# Altium PCB PCB1.PcbDoc
Units mm, origin at the board's own origin, x right, y up, seen from the top; angles counter-clockwise.
Board outline 150 x 32 mm, 2 copper layers (Top Layer, Bottom Layer); 77 components, 111 nets, 365 pads, 146 vias.
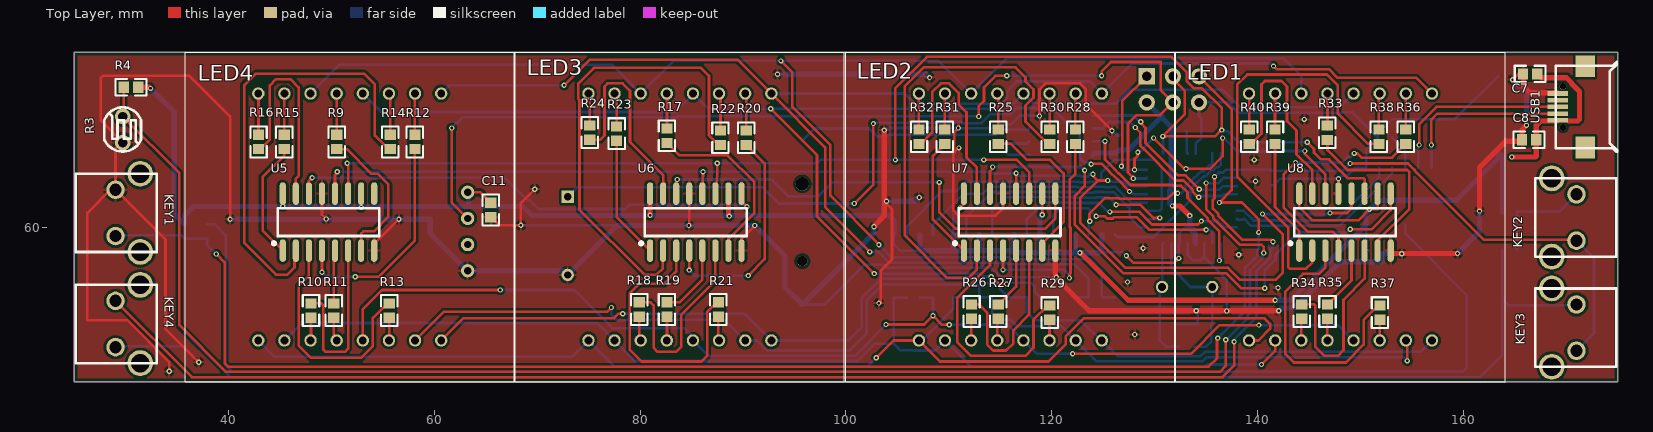
[diagram p0: Top Layer view]
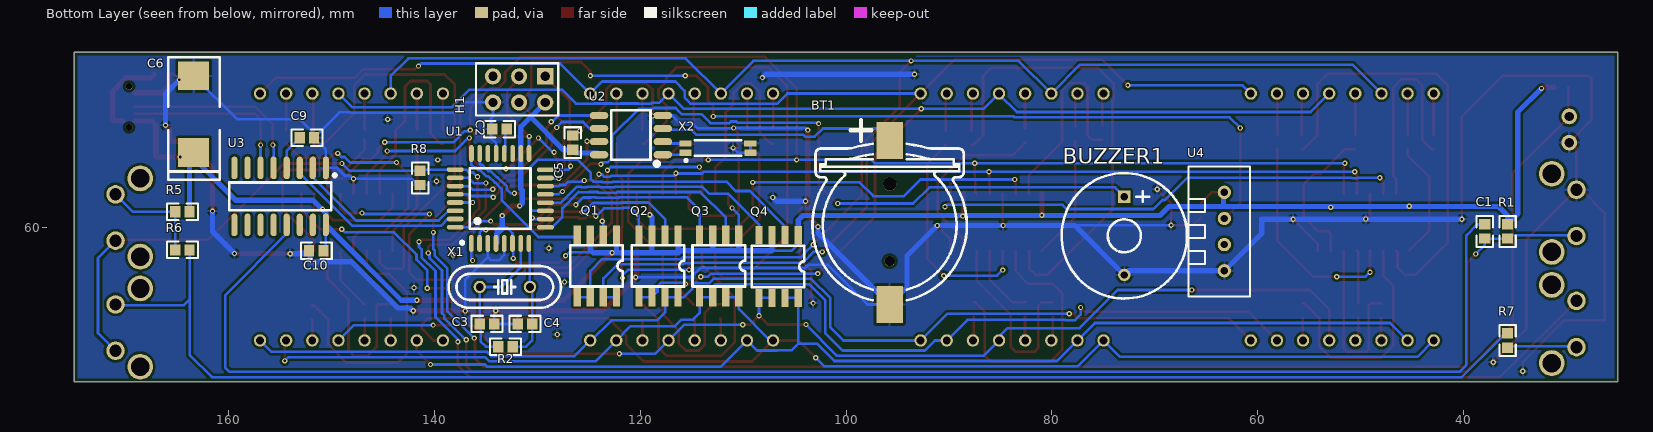
[diagram p1: Bottom Layer view, seen from below]

## Layer stack, top to bottom
Top Solder: solder mask 0.0102, Solder Resist, Dk 3.5
Top Layer: signal copper 0.0356
Dielectric 1: dielectric 0.32, FR-4, Dk 4.8
Bottom Layer: signal copper 0.0356
Bottom Solder: solder mask 0.0102, Solder Resist, Dk 3.5

## Board outline
25,45 175,45 175,77 25,77

## Design rules (kind name [scope] priority, off if disabled: settings)
Clearance [All] p1: gap=0.254 ignorepadtopadclearanceinfootprint=FALSE except(0: Arc-Hole Track-Hole SMDPad-Hole THPad-Hole Via-Hole Fill-Hole Poly-Hole Region-Hole Text-Hole)
PolygonConnect [All] p1: connectstyle=Relief reliefconductorwidth=0.254 reliefentries=4 polygonreliefangle="90 Angle" airgapwidth=0.254
RoutingVias [All] p1: holewidth=0.711 width=1.27 viastyle="Through Hole" minholewidth=0.711 minwidth=1.27 maxholewidth=0.711 maxwidth=1.27
SolderMaskExpansion [All] p1: expansion=0.102
Width [All] p1: maxlimit=1.27 minlimit=0.254 preferedwidth=0.254 minimp=50.000000 maximp=50.000000 favimp=50.000000
30 further rules are at their usual default settings.

## Components (designator, comment, footprint, x,y, rotation, side; value= is the part's Value field where it differs from the comment)
BT1 "1056" KEYSTONE_1056 95.758,60.452 r90 bottom locked
BUZZER1 "LS" BUZZER-R6.0-2P-7.6MM 72.949,59.172 r270 bottom
C1 "0.1uF" 0603 37.9,59.6 r90 bottom
C2 "0.1uF" 0603 133.68,69.545 r180 bottom
C3 "22pF" 0603 134.9,50.6 r0 bottom
C4 "22pF" 0603 131.2,50.6 r180 bottom
C5 "0.1uF" 0603 126.568,68.224 r270 bottom
C6 "470uF" CASE-D_7343 163.4,71 r270 bottom
C7 "10uF" 0603 166.5,74.9 r0 top
C8 "0.1uF" 0603 166.4,68.5 r0 top
C9 "0.1uF" 0603 152.4,68.7 r0 bottom
C10 "0.1uF" 0603 151.486,57.709 r180 bottom
C11 "0.1uF" 0603 65.481,61.671 r90 top
H1 "ISP" HDR-3X2/2.54 131.775,73.406 r0 bottom
KEY1 "RST" SW-TH_BBJ6X6X5PH260G 30.2,61.4 r270 top
KEY2 "RST" SW-TH_BBJ6X6X5PH260G 169.8,60.95 r90 top
KEY3 "RST" SW-TH_BBJ6X6X5PH260G 169.8,50.25 r90 top
KEY4 "RST" SW-TH_BBJ6X6X5PH260G 30.2,50.6 r270 top
LED1 "8*8LED" 8X8LED 132.055,45 r0 top locked
LED2 "8*8LED" 8X8LED 99.965,45 r0 top locked
LED3 "8*8LED" 8X8LED 67.845,45 r0 top locked
LED4 "8*8LED" 8X8LED 35.755,45 r0 top locked
Q1 "4953" SOP-8 124.221,56.248 r0 bottom
Q2 "4953" SOP-8 118.221,56.248 r0 bottom
Q3 "4953" SOP-8 112.321,56.248 r0 bottom
Q4 "4953" SOP-8 106.556,56.196 r0 bottom
R1 "1K" 0603 35.7,59.6 r90 bottom
R2 "1M" 0603 133.1,48.4 r0 bottom
R3 "GL4516" RES-TH_L4.30-W3.60-L 29.7,69.5 r270 top
R4 "10K" 0603 30.5,73.6 r0 top
R5 "1K" 0603 164.5,61.5 r180 bottom
R6 "1K" 0603 164.5,57.8 r0 bottom
R7 "1K" 0603 35.7,49 r90 bottom
R8 "1K" 0603 141.4,64.8 r90 bottom
R9 "1K" 0603 50.5,68.3 r90 top
R10 "1K" 0603 48,51.9 r270 top
R11 "1K" 0603 50.2,51.9 r270 top
R12 "1K" 0603 58.1,68.3 r90 top
R13 "1K" 0603 55.6,51.9 r270 top
R14 "1K" 0603 55.7,68.3 r90 top
R15 "1K" 0603 45.4,68.3 r90 top
R16 "1K" 0603 42.9,68.3 r90 top
R17 "1K" 0603 82.6,68.9 r90 top
R18 "1K" 0603 79.9,52 r270 top
R19 "1K" 0603 82.6,52 r270 top
R20 "1K" 0603 90.3,68.7 r90 top
R21 "1K" 0603 87.6,52 r270 top
R22 "1K" 0603 87.8,68.7 r90 top
R23 "1K" 0603 77.7,69.1 r90 top
R24 "1K" 0603 75.1,69.2 r90 top
R25 "1K" 0603 114.8,68.8 r90 top
R26 "1K" 0603 112.2,51.8 r270 top
R27 "1K" 0603 114.8,51.8 r270 top
R28 "1K" 0603 122.3,68.8 r90 top
R29 "1K" 0603 119.8,51.7 r270 top
R30 "1K" 0603 119.8,68.8 r90 top
R31 "1K" 0603 109.6,68.8 r90 top
R32 "1K" 0603 107.1,68.8 r90 top
R33 "1K" 0603 146.787,69.19 r90 top
R34 "1K" 0603 144.3,51.8 r270 top
R35 "1K" 0603 146.8,51.8 r270 top
R36 "1K" 0603 154.4,68.8 r90 top
R37 "1K" 0603 151.9,51.7 r270 top
R38 "1K" 0603 151.8,68.8 r90 top
R39 "1K" 0603 141.7,68.8 r90 top
R40 "1K" 0603 139.2,68.8 r90 top
U1 "ATMEGA328P-AU" TQFP-32_7X7X08P 133.6,62.8 r90 bottom
U2 "DS1307ZN+" SOP-8_150MIL 120.904,68.961 r0 bottom
U3 "CH340C" SOP-16_150MIL 155,63 r270 bottom
U4 "DHT11" DHT11 63.221,59.588 r0 bottom
U5 "TM74HC595D" SOP-16_150MIL 49.7,60.5 r90 top
U6 "TM74HC595D" SOP-16_150MIL 85.4,60.5 r90 top
U7 "TM74HC595D" SOP-16_150MIL 115.9,60.5 r90 top
U8 "TM74HC595D" SOP-16_150MIL 148.5,60.5 r90 top
USB1 "Micro USB-B" MICRO-USB-12 170.5,71.7 r180 top
X1 "16MHz" 49S-CRYSTAL 133.162,54.2 r180 bottom
X2 "32.768KHz" MC-146 112.446,67.691 r180 bottom

## Footprints (in the part's own frame and the unit in brackets; to place one, negate y for a bottom-side part, rotate by r counter-clockwise, add the part's x,y. Pads: shape width x height; smd on the part's side, far side on the other; paste and mask are expansions set on the pad)
8X8LED [mm]
  round 1.2 hole 0.762: 1(7.12,4) 2(9.66,4) 3(12.2,4) 4(14.74,4) 5(17.28,4) 6(19.82,4) 7(22.36,4) 8(24.9,4) 9(24.9,28) 10(22.36,28) 11(19.82,28) 12(17.28,28) 13(14.74,28) 14(12.2,28) 15(9.66,28) 16(7.12,28)
  silkscreen extent 0,0 32,32
49S-CRYSTAL [mm]
  round 1.2 hole 0.75: 1(-2.438,0) 2(2.438,0)
  silkscreen extent -5.46,-2.03 5.46,2.03
0603 [mm]
  rect 1x1.1 smd: 1(-0.7,0) 2(0.7,0)
  silkscreen extent -1.5,-0.8 1.5,0.8
BUZZER-R6.0-2P-7.6MM [mm]
  rect 1.2x1.2 hole 0.7: 1(-3.8,0)
  round 1.2 hole 0.7: 2(3.8,0)
  silkscreen extent -6.1,-6.1 6.1,6.09
CASE-D_7343 [mil]
  rect 110.2x118.5 smd: 1(146.5,0) 2(-146.5,0)
  silkscreen extent -218,-97 252,100
DHT11 [mil]
  round 51 hole 28: 1(0,-150) 2(0,-50) 3(0,50) 4(0,150)
  silkscreen extent -98,-248 138,248
HDR-3X2/2.54 [mil]
  rect 62x62 hole 35: 1(-100,-50)
  round 62 hole 35: 2(-100,50) 3(0,-50) 4(0,50) 5(100,-50) 6(100,50)
  silkscreen extent -150,-100 165,100
KEYSTONE_1056 [mm]
  rect 3.6x2.6 smd: 1(7.961,0) 2(-7.961,0)
  round 1 hole 1 unplated: ""(-3.739,0)
  round 1.3 hole 1.3 unplated: ""(3.761,0)
  silkscreen extent -7.55,-7.51 9.99,7.5
MC-146 [mm]
  rect 1.2x0.6 smd: 1(-3.148,-0.453) 2(3.158,-0.45) 3(3.151,0.453) 4(-3.158,0.447)
  silkscreen extent -3.23,-1.33 2.25,0.75
MICRO-USB-12 [mm]
  rect 1.9x2.1 smd: 0(-1.335,3.95) 0(-1.335,-3.95)
  rect 2x0.45 smd: 1(1.335,1.3) 2(1.335,0.65) 3(1.335,0) 4(1.335,-0.65) 5(1.335,-1.3)
  round 0.65 hole 0.65 unplated: ""(0.814,1.999) ""(0.814,-1.999)
  silkscreen extent -4.46,-4.38 1.53,4.37
RES-TH_L4.30-W3.60-L [mil]
  round 60 hole 36: 1(-50,0) 2(50,0)
  silkscreen extent -85,-70 84,70
SOP-8 [mm]
  rect 0.701x1.8 smd: 1(-1.905,-3.048) 2(-0.635,-3.048) 3(0.635,-3.048) 4(1.905,-3.048) 5(1.905,3.048) 6(0.635,3.048) 7(-0.635,3.048) 8(-1.905,3.048)
  silkscreen extent -2.51,-2.01 2.6,2.01
SOP-8_150MIL [mm]
  oval 1.8x0.7 smd: 1(-3.099,1.905) 2(-3.099,0.635) 3(-3.099,-0.635) 4(-3.099,-1.905) 5(3.099,-1.905) 6(3.099,-0.635) 7(3.099,0.635) 8(3.099,1.905)
  silkscreen extent -2.71,-2.4 1.91,2.99
SOP-16_150MIL [mm]
  oval 2.2x0.6 smd: 1(-2.769,4.445) 2(-2.769,3.175) 3(-2.769,1.905) 4(-2.769,0.635) 5(-2.769,-0.635) 6(-2.769,-1.905) 7(-2.769,-3.175) 8(-2.769,-4.445) 9(2.769,-4.445) 10(2.769,-3.175) 11(2.769,-1.905) 12(2.769,-0.635) 13(2.769,0.635) 14(2.769,1.905) 15(2.769,3.175) 16(2.769,4.445)
  silkscreen extent -2.2,-4.95 1.35,5.46
SW-TH_BBJ6X6X5PH260G [mm]
  round 1.8 hole 1.2: 1(-2.25,-1.2) 2(2.25,-1.2)
  round 2.5 hole 1.8: 3(3.8,1.2) 4(-3.8,1.2)
  silkscreen extent -3.8,-5.05 3.8,2.8
TQFP-32_7X7X08P [mm]
  oval 1.65x0.45 smd: 1(-4.369,2.817) 2(-4.369,2.017) 3(-4.369,1.217) 4(-4.369,0.417) 5(-4.369,-0.381) 6(-4.369,-1.181) 7(-4.369,-1.981) 8(-4.369,-2.781) 17(4.369,-2.791) 18(4.369,-1.991) 19(4.369,-1.191) 20(4.369,-0.391) 21(4.369,0.406) 22(4.369,1.206) 23(4.369,2.007) 24(4.369,2.807)
  oval 0.45x1.65 smd: 9(-2.804,-4.381) 10(-2.004,-4.381) 11(-1.204,-4.381) 12(-0.404,-4.381) 13(0.394,-4.381) 14(1.194,-4.381) 15(1.994,-4.381) 16(2.794,-4.381) 25(2.804,4.381) 26(2.004,4.381) 27(1.204,4.381) 28(0.404,4.381) 29(-0.394,4.381) 30(-1.194,4.381) 31(-1.994,4.381) 32(-2.794,4.381)
  silkscreen extent -4.45,-2.94 2.95,3.86

## Via types
v1: diameter 0.508, hole 0.254, Top Layer to Bottom Layer, tented both sides, 146 vias

## Nets (pads, with @x,y where several pads share a name; then routed paths per layer and width w, separated by ;. In a path a pad name is that pad's centre, name@x,y a point inside that pad or via, vN(x,y) a via of type N, cw(c..) or ccw(c..) an arc to the next point about the centre after c; other vN are vias at no path point)
+5V: C5.2 C6.1 C7.2 C8.2 C10.2 C11.2 H1.2 Q1.1 Q1.3 Q2.1 Q2.3 Q3.1 Q3.3 Q4.1 Q4.3 R1.2 R4.2 R5.2 U1.4 U1.6 U1.18 U2.8 U3.16 U4.1 U5.10 U5.16 U6.10 U6.16 U7.10 U7.16 U8.10 U8.16 USB1.1 | length 262.2
  Top Layer w0.254: U4.1 64.454,63.398 C11.2 ; v1(111.074,61.874) 111.455,62.255 U7.16 ; v1(119.075,61.214) U7.10 ; v1(127.254,57.226) 127.914,56.566 131.928,56.566 v1(132.334,56.972) ; U8.16 144.055,61.99 145.364,60.681 149.798,60.681 v1(150.876,61.759) 151.675,61.759 U8.10
  Top Layer w0.508: R4.2 32.3,73.6 v1(32.4,73.5) ; v1(80.955,61.158) U6.16 ; U6.10 88.575,61.158 v1(88.646,61.087) ; v1(122.737,57.531) 122.809,57.531 127.432,52.908 v1(141.707,52.908) ; v1(131.724,62.078) 132.461,62.078 v1(133.401,61.138) ; v1(164.719,66.827) 167.005,66.827 167.1,66.922 C8.2 167.1,69.92 167.497,70.317 USB1.1@169.124,70.317 ; C7.2 167.568,74.532 170.031,74.532 170.519,74.044 170.519,73.981 171.3,73.2 171.3,70.5 171.117,70.317 170.248,70.317
  Bottom Layer w0.254: Q4.1 104.651,58.346 105.285,57.711 107.191,57.711 ; Q3.1 110.416,61.216 v1(111.074,61.874) ; 124.638,57.582 126.898,57.582 v1(127.254,57.226) ; v1(132.334,56.972) 132.334,58.346 U1.6 132.419,59.419 132.969,59.969 133.401,59.969 133.756,59.969 134.017,59.709 U1.4 ; U3.16 150.555,57.939 C10.2
  Bottom Layer w0.508: v1(32.4,73.5) 34.7,71.2 34.7,61.3 R1.2 35.7,61.151 36.563,62.014 63.297,62.014 ; U4.1 63.297,63.322 63.297,62.014 ; Q4.1 104.651,60.678 104.191,61.138 69.494,61.138 68.618,62.014 63.297,62.014 ; Q4.3 107.191,57.711 110.416,57.711 ; Q3.1 110.416,57.711 ; Q3.3 112.956,57.711 ; Q2.1 116.316,57.531 ; v1(119.075,61.214) 118.856,60.994 Q2.3 118.856,57.531 ; Q1.1 122.316,57.531 ; U2.8 124.155,67.208 126.252,67.208 C5.2 127.443,67.524 130.645,70.726 ; Q1.3 124.856,57.8 124.638,57.582 124.587,57.531 v1(122.737,57.531) 122.316,57.531 ; H1.2 130.581,70.79 ; v1(131.724,62.078) 131.47,62.332 131.47,63.612 131.609,63.751 U1.18 131.609,69.763 130.645,70.726 ; v1(133.401,61.138) 133.401,59.969 133.401,59.886 133.952,59.335 133.952,58.496 U1.4 ; v1(141.707,52.908) 143.232,52.908 U3.16 150.555,61.357 151.834,62.636 159.334,62.636 163.4,66.702 C6.1 163.8,66.879 R5.2 ; 110.416,57.711 112.956,57.711 ; 112.956,57.711 116.136,57.711 116.316,57.531 ; 116.316,57.531 118.856,57.531 ; 118.856,57.531 122.316,57.531 ; 130.581,70.79 130.708,70.79 130.645,70.726 ; 130.581,70.79 130.645,70.726
  other v1: 52.875,61.933 45.255,62.035
BUZZER: BUZZER1.1 U1.13 | length 69.1
  Top Layer w0.254: v1(100.813,62.306) 102.667,64.16 v1(102.667,70.079) ; v1@123.901,66.167 124.876,66.167 125.628,65.414 125.628,65.389 126.298,64.719 126.323,64.719 127.559,63.484 v1(127.559,63.475)
  Bottom Layer w0.254: BUZZER1.1 73.858,63.881 91.897,63.881 93.472,62.306 v1(100.813,62.306) ; v1@102.794,70.155 110.532,70.155 110.659,70.282 111.185,70.282 111.337,70.129 113.166,70.129 114.04,71.003 115.966,71.003 116.56,71.597 118.658,71.597 118.744,71.511 120.132,71.511 122.722,68.921 122.722,66.753 123.15,66.325 123.616,66.325 v1(123.825,66.116) ; v1@127.762,63.398 127.967,63.194 U1.13
D+: U3.5 USB1.3 | length 18.4
  Top Layer w0.254: v1(155.7,68) 155.7,70 157.4,71.7 USB1.3
  Bottom Layer w0.254: U3.5 155.635,67.935 v1(155.7,68)
D-: U3.6 USB1.2 | length 17.2
  Top Layer w0.254: v1(156.9,68) 156.9,70.482 157.468,71.05 USB1.2
  Bottom Layer w0.254: v1(156.9,68) 156.905,67.995 U3.6
DATA: H1.1 U1.16 U8.14 | length 40.2
  Top Layer w0.254: v1(126.771,65.938) 126.848,65.938 126.848,72.288 H1.1 ; v1(128.041,65.594) 128.041,66.65 128.372,66.98 v1(128.372,67.285) ; v1(129.896,68.682) 132.893,65.684 v1(133.045,65.684) 135.382,65.684 136.601,66.904 v1(136.601,68.682) ; v1(144.602,67.412) 144.602,67.107 146.595,65.114 U8.14
  Bottom Layer w0.254: v1(126.771,65.938) 126.771,65.786 126.963,65.594 v1(128.041,65.594) U1.16 U1.16@129.157,65.532 ; v1(128.372,67.285) 128.499,67.285 v1(129.896,68.682) ; v1(136.601,68.682) 136.728,68.682 137.998,67.412 v1(144.602,67.412)
DTR: C1.2 U3.13 | length 152.3
  Bottom Layer w0.254: C1.2 38.6,60.3 39.7,59.2 39.7,46.6 40.361,45.939 159.934,45.939 160.35,46.355 160.35,53.391 154.365,59.376 U3.13
GND: BT1.2 BUZZER1.2 C2.1 C3.1 C4.1 C5.1 C6.2 C7.1 C8.1 C9.1 C10.1 C11.1 H1.6 KEY1.1 R3.2 R8.1 U1.3 U1.5 U1.21 U2.4 U3.1 U4.4 U5.8 U5.13 U6.8 U6.13 U7.8 U7.13 U8.8 U8.13 USB1.5 X2.2 X2.3 | length 454.9
  Top Layer w0.254: v1(34.214,45.999) 34.214,46.918 30.154,50.978 26.264,50.978 26.264,61.392 28.522,63.65 KEY1.1 ; v1(37.084,46.888) 33.858,50.114 33.858,58.792 KEY1.1 ; v1(40.132,60.782) 40.132,70.764 36.17,74.727 27.762,74.727 27.572,74.537 27.572,70.358 R3.2 29.53,68.23 29,67.7 KEY1.1 ; U5.13 49.065,61.222 v1(49.479,60.808) ; U5.8 54.145,58.387 v1(56.54,60.782) ; C11.1 66.254,60.198 v1(68.402,60.198) 68.402,62.357 v1(69.748,63.703) ; v1(84.734,60.173) 84.765,60.203 U6.13 ; U6.8 89.845,58.882 v1(91.135,60.173) ; v1(103.2,52.629) 103.378,52.807 103.378,55.762 103.37,55.77 104.47,56.871 104.47,61.773 v1@103.708,62.535 ; v1(110.922,69.647) 110.531,69.256 110.531,67.442 110.439,67.35 ; v1(110.973,67.716) 110.607,67.35 110.439,67.35 ; U7.13@115.164,63.167 U7.13 115.265,61.849 114.554,61.138 110.913,61.138 110.439,61.611 110.439,67.35 ; v1(118.804,70.815) 118.804,73.406 119.379,73.981 122.731,73.981 123.306,73.406 123.306,71.944 v1(125.857,69.393) ; U8.13 v1(147.865,64.719) ; v1(164.795,74.346) 165.349,74.9 C7.1
  Top Layer w0.508: v1(102.718,60.046) 102.718,60.096 103.708,61.087 103.708,62.535 v1(103.708,69.444) ; U7.8 120.345,55.169 123.622,51.892 v1(134.036,51.892) v1(142.062,51.892) ; U8.8 153.222,57.455 v1(159.436,57.455) ; v1(161.569,61.57) 161.569,65.811 164.109,68.351 165.551,68.351 C8.1 165.7,69.485 v1(166.141,69.926) ; C7.1 165.862,74.838 165.862,73.711 166.49,73.083 USB1.5@169.124,73.083
  Bottom Layer w0.254: v1(68.402,60.198) v1@91.135,60.198 ; BT1.2 97.932,52.491 101.803,56.363 103.659,56.363 103.962,56.06 114.161,56.06 115.078,55.143 v1(120.447,55.143) ; v1(103.708,69.444) 103.911,69.647 v1(110.922,69.647) ; X2.3 109.287,68.137 X2.2 110.497,67.241 v1(110.973,67.716) ; v1@110.896,69.621 114.452,69.621 114.833,70.002 116.027,70.002 116.891,70.866 U2.4 118.753,70.866 v1(118.804,70.815) ; v1(125.857,69.393) 126.325,68.924 C5.1 ; C4.1 C3.1 134.2,51.728 v1(134.036,51.892) ; U1.5 133.219,57.306 133.731,56.794 134.518,56.794 134.817,57.093 ; U1.21 134.006,68.17 134.533,68.696 134.533,70.547 134.315,70.764 H1.6 137.127,72.136 138.118,71.145 148.199,71.145 148.224,71.171 149.229,71.171 C9.1 ; U1.3 134.817,57.093 ; v1(137.008,51.867) 137.008,54.902 134.817,57.093 ; R8.1 141.589,64.1 142.208,64.719 v1(147.865,64.719) 148.138,64.992 148.69,64.992 149.467,65.769 U3.1 150.555,67.555 C9.1 ; C6.2 159.164,70.485 153.086,70.485 151.7,69.099 C9.1
  Bottom Layer w0.508: v1(40.132,60.782) v1(56.54,60.782) 59.588,60.782 59.588,59.411 U4.4 72.542,55.778 BUZZER1.2 77.749,60.173 v1(84.734,60.173) v1(91.135,60.173) 94.082,57.226 94.082,54.167 BT1.2 102.718,59.451 v1(102.718,60.046) ; v1(93.345,74.879) 107.798,74.879 v1(108.128,74.549) ; v1(103.937,62.535) 106.756,62.535 v1(107.112,62.89) ; v1(142.062,51.892) 142.316,52.146 143.547,52.146 148.052,56.651 152.095,56.651 152.095,57.429 v1(154.026,57.429) ; v1(159.436,57.455) 161.569,59.588 v1(161.569,61.57) ; v1(164.795,74.346) 166.141,73 v1(166.141,69.926)
  other v1: 128.067,49.581 141.986,54.127 127.356,54.686 138.176,57.328 128.88,57.963 139.802,64.465 139.675,66.548 144.551,70.485
H1: Q1.2 U1.23 | length 17.3
  Top Layer w0.254: v1(123.698,60.579) 123.673,60.604 123.673,61.325 125.175,62.827 126.514,62.827 126.552,62.789 131.267,62.789 131.826,63.348 131.877,63.297 v1(132.232,63.297)
  Bottom Layer w0.254: Q1.2 123.586,60.467 v1(123.698,60.579) ; v1(132.232,63.297) 132.584,63.297 132.969,63.682 132.969,63.948 133.867,64.846 133.93,64.846 134.551,65.467 134.754,65.467 134.968,65.682 135.34,66.054 135.52,66.054 135.607,66.14 U1.23
H1OUT: LED1.9 LED2.9 LED3.9 LED4.9 Q1.7 Q1.8 | length 148.4
  Top Layer w0.254: v1(72.6,73.8) 75.1,76.3 89.445,76.3 LED3.9 97.968,67.777 97.968,61.951 v1(102.311,57.607) ; v1(141.554,75.667) 141.859,75.362 146.946,75.362 147.784,74.524 155.431,74.524 LED1.9
  Bottom Layer w0.254: LED4.9 61.455,73.8 v1(72.6,73.8) ; LED3.9 105.698,73 106.679,72.019 115.111,72.019 115.686,72.594 115.686,73.268 116.586,74.168 123.697,74.168 LED2.9 127.786,75.921 141.3,75.921 v1(141.554,75.667) ; v1(102.311,57.607) 103.168,57.607 103.508,57.267 103.508,57.233 104.172,56.568 114.923,56.568 115.002,56.489 115.741,56.489 115.842,56.388 122.225,56.388 123.586,55.027 Q1.7 Q1.8
H2: Q1.4 U1.24 | length 15
  Bottom Layer w0.254: Q1.4 126.366,59.055 129.896,59.055 133.477,62.636 133.477,63.738 134.078,64.338 134.14,64.338 134.761,64.959 134.964,64.959 135.179,65.174 135.551,65.546 135.73,65.546 136.022,65.837 136.195,65.837 136.407,66.049 U1.24
H2OUT: LED1.14 LED2.14 LED3.14 LED4.14 Q1.5 Q1.6 | length 153.5
  Top Layer w0.254: v1(93.675,76.175) 94.793,75.057 94.793,71.671 98.476,67.988 98.476,63.068 103.226,58.318 v1(103.2,58.293)
  Bottom Layer w0.254: LED4.14 50.755,75.8 77.245,75.8 LED3.14 83.22,76.175 v1(93.675,76.175) 108.99,76.175 LED2.14 115.594,76.429 142.545,76.429 144.255,74.718 LED1.14 ; v1(103.2,58.293) 104.016,57.478 104.016,57.443 104.383,57.076 115.873,57.076 116.053,56.896 123.723,56.896 124.856,55.764 Q1.6 Q1.5
H3: Q2.2 U1.32 | length 23.9
  Top Layer w0.254: v1(125.654,61.493) 128.542,61.493 129.761,60.274 134.214,60.274 v1(134.544,60.604)
  Bottom Layer w0.254: Q2.2 117.586,60.791 119.202,62.408 121.824,62.408 121.875,62.357 124.582,62.357 125.445,61.493 v1(125.654,61.493) ; v1(134.544,60.604) 135.992,60.604 136.068,60.681 136.742,60.006 U1.32
H3OUT: LED1.8 LED2.8 LED3.8 LED4.8 Q2.7 Q2.8 | length 107.4
  Top Layer w0.254: LED4.8 62.82,51.165 77.463,51.165 77.898,51.6 v1(78.3,51.6)
  Bottom Layer w0.254: v1(78.3,51.6) 90.145,51.6 LED3.8 100.257,49 101.524,50.267 101.524,53.119 103.394,54.989 103.858,54.989 ; 103.881,54.989 112.887,54.989 113.317,54.559 114.385,54.559 114.411,54.585 114.63,54.585 114.957,54.258 114.957,54.004 115.761,53.2 Q2.8 Q2.7 117.586,51.731 118.364,50.952 122.809,50.952 124.761,49 LED2.8 126.396,47.469 134.458,47.469 134.881,47.892 155.847,47.892 LED1.8
H4: Q2.4 U1.2 | length 19.9
  Top Layer w0.254: v1(124.308,61.062) 125.188,61.062 125.391,60.858 125.917,60.858 126.044,60.985 128.245,60.985 129.464,59.766 v1(135.001,59.766)
  Bottom Layer w0.254: Q2.4 120.126,61.147 120.879,61.9 121.614,61.9 121.664,61.849 123.52,61.849 v1(124.308,61.062) ; v1(135.001,59.766) 135.077,59.766 135.153,59.69 135.28,59.817 135.617,59.481 U1.2
H4OUT: LED1.12 LED2.12 LED3.12 LED4.12 Q2.5 Q2.6 | length 140.2
  Top Layer w0.254: v1(92.685,71.526) 97.18,67.031 97.18,61.062 v1(102.743,55.499) ; v1(114.122,55.194) 114.173,55.194 114.884,54.483 v1(115.595,54.483)
  Bottom Layer w0.254: LED4.12 54.835,71.2 83.4,71.2 85.125,72.925 LED3.12 86.614,71.511 115.756,71.511 LED2.12 118.14,72.105 118.868,72.105 118.954,72.019 120.191,72.019 120.207,72.034 121.903,72.034 121.919,72.019 122.731,72.019 122.747,72.034 124.443,72.034 124.459,72.019 126.248,72.019 127.61,73.381 136.601,73.381 138.328,71.653 147.988,71.653 LED1.12 ; v1(102.743,55.499) 102.745,55.497 113.097,55.497 113.4,55.194 v1(114.122,55.194) ; v1@115.646,54.534 115.722,54.61 117.965,54.61 118.317,54.258 118.317,53.738 Q2.6 Q2.5
H5: Q3.2 U1.9 | length 22.2
  Bottom Layer w0.254: Q3.2 111.686,60.936 114.173,63.424 122.245,63.424 122.296,63.373 124.084,63.373 124.135,63.424 124.952,63.424 124.977,63.398 125.924,63.398 125.949,63.424 125.977,63.424 127.512,61.888 127.57,61.888 127.57,60.987 128.562,59.996 U1.9
H5OUT: LED1.1 LED2.1 LED3.1 LED4.1 Q3.7 Q3.8 | length 115
  Top Layer w0.254: v1(102.946,47.32) 104.626,49 LED2.1 109.13,46.955 119.685,46.955 121.344,48.614 121.344,49.406 123.093,51.156 140.691,51.156 141.224,50.622 141.224,50.14 140.084,49 LED1.1
  Bottom Layer w0.254: LED4.1 44.475,47.4 73.365,47.4 LED3.1 77.47,46.495 102.121,46.495 v1(102.946,47.32) ; LED2.1 107.369,49 110.416,52.046 Q3.8 Q3.7
H6: Q3.4 U1.10 | length 21.5
  Top Layer w0.254: v1(126.251,62.192) 128.562,62.192 129.921,60.833 129.997,60.909 v1(130.505,60.909)
  Bottom Layer w0.254: Q3.4 114.226,61.698 115.443,62.916 122.035,62.916 122.085,62.865 124.295,62.865 124.345,62.916 124.741,62.916 124.767,62.89 125.552,62.89 v1(126.251,62.192) ; U1.10 130.468,60.796 130.505,60.833 v1(130.505,60.909)
H6OUT: LED1.7 LED2.7 LED3.7 LED4.7 Q3.5 Q3.6 | length 111.5
  Top Layer w0.254: LED4.7 60.915,51.8 76.8,51.8 v1(77.2,52.2) ; LED1.7 154.559,48.856 v1(154.559,47.015)
  Bottom Layer w0.254: v1(77.2,52.2) 77.2,51.5 77.735,50.965 78.663,50.965 78.698,51 88.205,51 LED3.7 91.358,49 92.339,48.019 100.343,48.019 102.032,49.708 102.032,52.908 103.604,54.481 112.677,54.481 112.956,54.202 Q3.6 Q3.5 114.226,51.662 114.859,51.029 115.976,51.029 116.611,50.394 120.931,50.394 LED2.7 124.364,46.961 134.668,46.961 135.091,47.384 154.19,47.384 v1(154.559,47.015)
H7: Q4.2 U1.11 | length 34.6
  Bottom Layer w0.254: Q4.2 105.921,60.092 109.354,63.525 110.719,63.525 111.633,64.44 122.666,64.44 122.717,64.389 123.663,64.389 123.714,64.44 124.562,64.44 124.816,64.694 124.816,65.303 126.086,66.573 129.947,66.573 130.708,65.812 130.708,61.826 130.479,61.596 U1.11
H7OUT: LED1.2 LED2.2 LED3.2 LED4.2 Q4.7 Q4.8 | length 108.4
  Top Layer w0.254: v1(140.386,46.66) 141.715,47.989 LED1.2
  Bottom Layer w0.254: LED4.2 47.115,50.7 75.805,50.7 LED3.2 77.517,49 79.514,47.003 101.13,47.003 102.791,48.664 104.651,48.664 ; Q4.7 Q4.8 104.651,48.664 ; v1(140.386,46.66) 135.085,46.66 134.879,46.453 112.172,46.453 LED2.2 108.644,48.019 106.679,48.019 106.666,48.031 105.283,48.031 104.651,48.664
H8: Q4.4 U1.12 | length 24
  Bottom Layer w0.254: Q4.4 108.461,60.251 111.482,63.272 113.303,63.272 113.963,63.932 122.455,63.932 122.506,63.881 123.874,63.881 123.925,63.932 125.162,63.932 125.188,63.906 125.714,63.906 125.739,63.932 126.187,63.932 127.723,62.396 U1.12
H8OUT: LED1.5 LED2.5 LED3.5 LED4.5 Q4.5 Q4.6 | length 110.9
  Top Layer w0.254: LED4.5 53.035,52.035 54.9,53.9 v1(66.4,53.9) ; v1(103.886,50.546) 107.6,50.546 v1(108.461,51.407) 109.347,50.521 v1(110.033,50.521) ; v1(122.022,47.701) 133.528,47.701 136.322,50.495 v1(140.132,50.495)
  Bottom Layer w0.254: v1(66.4,53.9) 73.6,53.9 77.3,50.2 84.3,50.2 85.125,49.375 LED3.5 86.614,47.511 100.851,47.511 v1(103.886,50.546) ; Q4.6 Q4.5 v1(108.461,51.407) v1@108.483,51.384 ; v1(110.033,50.521) 115.724,50.521 LED2.5 118.544,47.701 v1(122.022,47.701) ; v1(140.132,50.495) 147.84,50.495 LED1.5
INT: U1.1 U2.7 | length 22
  Top Layer w0.254: v1(125.171,68.351) 125.171,66.59 126.136,65.625 126.136,65.599 126.508,65.227 126.534,65.227 127.651,64.11 131.768,64.11 131.844,64.033 132.574,64.033 133.198,63.409 133.198,62.849 135.179,60.867 135.179,60.684 136.296,59.567 v1(136.296,56.769)
  Bottom Layer w0.254: U2.7 124.028,68.351 v1(125.171,68.351) ; v1(136.296,56.769) 136.22,56.769 136.417,56.966 U1.1
KEY: KEY2.1 KEY3.1 KEY4.1 R8.2 U1.25 | length 187.2
  Top Layer w0.254: KEY4.1 36.419,45.431 136.6,45.431 137.719,46.55 v1(137.719,48.87) ; v1(135.814,64.911) 135.814,62.824 135.659,62.669 135.659,61.824 136.195,61.288 136.195,61.105 138.5,58.8 141.3,58.8 v1(141.5,58.6) ; v1(149,66.2) 154.635,66.2 155.27,65.565 155.27,65.532 162.021,58.781 171,58.781 KEY2.1
  Bottom Layer w0.254: v1(135.814,64.911) 136.232,65.329 136.652,65.329 136.927,65.604 U1.25 141.296,65.604 R8.2 148.3,65.5 v1(149,66.2) ; v1@137.716,49.079 139.903,51.266 139.903,55.73 141.243,57.07 141.243,57.837 141.5,58.094 v1(141.5,58.6) ; KEY3.1 172.7,49.7 172.7,57 KEY2.1
LUX: R3.1 R4.1 U1.26 | length 155.4
  Top Layer w0.254: R4.1 29.8,70.87 R3.1 35.2,65.27 35.2,50.482 39.743,45.939 136.339,45.939 136.906,46.506 v1(136.906,49.073) ; v1(135,64.3) 135,61.765 135.687,61.078 135.687,60.895 138.29,58.292 140.408,58.292 140.608,58.092 v1(140.608,57.5)
  Bottom Layer w0.254: v1(135,64.3) 135.024,64.276 136.176,64.276 136.704,64.804 U1.26 ; v1@136.949,49.03 139.04,51.121 139.04,51.402 139.268,51.631 139.268,55.814 140.481,57.027 140.481,57.373 v1(140.608,57.5)
MOSI: H1.4 U1.15 U4.2 | length 99.3
  Top Layer w0.254: v1(61.671,69.647) 61.671,62.408 U4.2 ; v1(112.903,70.764) 112.903,71.78 113.411,72.288 113.411,73.609 114.529,74.727 v1(115.621,74.727) ; v1@124.816,74.701 v1(124.841,74.727) 124.841,75.159 125.743,76.061 130.593,76.061 130.607,76.048 130.607,73.304 H1.4 130.531,70.891 128.219,70.891 127.406,70.079 127.406,65.331 127.778,64.959 127.914,64.959 v1(127.914,64.745)
  Bottom Layer w0.254: v1(61.671,69.647) 62.716,70.692 83.61,70.692 83.708,70.79 112.878,70.79 v1(112.903,70.764) ; v1(115.621,74.727) v1(124.841,74.727) v1@124.866,74.727 ; v1(127.914,64.745) 129.118,64.745 129.144,64.719 U1.15
NetBT1_1: BT1.1 U2.3 | length 23.2
  Bottom Layer w0.254: BT1.1 96.941,69.596 102.251,69.596 103.039,68.809 103.971,68.809 104.174,69.012 114.561,69.012 115.044,69.494 117.704,69.494 U2.3
NetC2_2: C2.2 U1.20 | length 2.2
  Bottom Layer w0.254: C2.2@133.133,69.342 133.133,67.245 U1.20
NetC3_2: C3.2 R2.2 U1.7 X1.1 | length 14.4
  Bottom Layer w0.254: U1.7 131.619,56.081 133.5,54.2 X1.1 C3.2 135.509,50.509 135.509,48.909 135,48.4 R2.2
NetC4_2: C4.2 R2.1 U1.8 X1.2 | length 11.7
  Bottom Layer w0.254: U1.8 130.723,58.336 X1.2 130.5,53.977 C4.2 130.5,49 131.1,48.4 R2.1
NetC9_2: C9.2 U3.4 | length 3.5
  Bottom Layer w0.254: C9.2 154.365,67.435 U3.4
NetKEY2_2: KEY2.2 R5.1 R6.2 | length 10.2
  Bottom Layer w0.254: R6.2 R5.1 169.3,61.5 KEY2.2
NetKEY3_2: KEY3.2 R6.1 R7.2 | length 148.5
  Bottom Layer w0.254: R7.2 35.889,49.7 36.631,48.958 36.631,48.951 40.151,45.431 161.631,45.431 163.8,47.6 163.8,53 ; R6.1 163.8,53 ; KEY3.2 171,52.419 164.381,52.419 163.8,53
NetKEY4_2: KEY4.2 R7.1 | length 6.8
  Bottom Layer w0.254: KEY4.2 29,48.431 35.569,48.431 R7.1
NetLED1_3: LED1.3 R34.2 | length 2.1
  Top Layer w0.254: LED1.3 144.255,51.055 R34.2
NetLED1_4: LED1.4 R35.2 | length 2.1
  Top Layer w0.254: LED1.4 146.795,51.095 R35.2
NetLED1_6: LED1.6 R37.2 | length 2
  Top Layer w0.254: LED1.6 151.875,50.975 R37.2
NetLED1_10: LED1.10 R36.2 | length 3.5
  Top Layer w0.254: R36.2 154.4,72.985 LED1.10
NetLED1_11: LED1.11 R38.2 | length 3.5
  Top Layer w0.254: R38.2 151.8,72.925 LED1.11
NetLED1_13: LED1.13 R33.2 | length 3.5
  Top Layer w0.254: LED1.13 146.8,72.995 R33.2@146.8,69.5
NetLED1_15: LED1.15 R39.2 | length 3.5
  Top Layer w0.254: R39.2 141.7,72.985 LED1.15
NetLED1_16: LED1.16 R40.2 | length 3.5
  Top Layer w0.254: LED1.16 139.2,72.975 R40.2
NetLED2_3: LED2.3 R26.2 | length 2.1
  Top Layer w0.254: LED2.3 112.165,51.065 R26.2
NetLED2_4: LED2.4 R27.2 | length 2.1
  Top Layer w0.254: LED2.4 114.705,51.005 R27.2
NetLED2_6: LED2.6 R29.2 | length 2
  Top Layer w0.254: LED2.6 119.785,50.985 R29.2
NetLED2_10: LED2.10 R28.2 | length 3.5
  Top Layer w0.254: R28.2 122.3,72.975 LED2.10
NetLED2_11: LED2.11 R30.2 | length 3.5
  Top Layer w0.254: LED2.11 119.8,72.985 R30.2
NetLED2_13: LED2.13 R25.2 | length 3.5
  Top Layer w0.254: LED2.13 114.8,72.905 R25.2
NetLED2_15: LED2.15 R31.2 | length 3.5
  Top Layer w0.254: R31.2 109.6,72.975 LED2.15
NetLED2_16: LED2.16 R32.2 | length 3.5
  Top Layer w0.254: LED2.16 107.085,69.515 R32.2
NetLED3_3: LED3.3 R18.2 | length 2.4
  Top Layer w0.254: R18.2 79.9,49.145 LED3.3
NetLED3_4: LED3.4 R19.2 | length 2.3
  Top Layer w0.254: LED3.4 82.6,49.015 R19.2
NetLED3_6: LED3.6 R21.2 | length 2.3
  Top Layer w0.254: R21.2 87.6,49.065 LED3.6
NetLED3_10: LED3.10 R20.2 | length 3.6
  Top Layer w0.254: LED3.10 90.3,72.905 R20.2
NetLED3_11: LED3.11 R22.2 | length 3.7
  Top Layer w0.254: LED3.11 87.8,72.865 R22.2
NetLED3_13: LED3.13 R17.2 | length 3.4
  Top Layer w0.254: LED3.13 82.6,72.985 R17.2
NetLED3_15: LED3.15 R23.2 | length 3.3
  Top Layer w0.254: LED3.15 77.7,72.805 R23.2
NetLED3_16: LED3.16 R24.2 | length 3.2
  Top Layer w0.254: LED3.16 75.1,72.865 R24.2
NetLED4_3: LED4.3 R10.2 | length 2.2
  Top Layer w0.254: LED4.3 48,49.045 R10.2
NetLED4_4: LED4.4 R11.2 | length 2.3
  Top Layer w0.254: R11.2 50.2,49.295 LED4.4
NetLED4_6: LED4.6 R13.2 | length 2.2
  Top Layer w0.254: LED4.6 55.6,49.025 R13.2
NetLED4_10: LED4.10 R12.2 | length 4
  Top Layer w0.254: R12.2 58.1,72.985 LED4.10
NetLED4_11: LED4.11 R14.2 | length 4.1
  Top Layer w0.254: LED4.11 55.7,72.875 R14.2
NetLED4_13: LED4.13 R9.2 | length 4
  Top Layer w0.254: LED4.13 50.5,72.995 R9.2
NetLED4_15: LED4.15 R15.2 | length 4
  Top Layer w0.254: R15.2 45.4,72.985 LED4.15
NetLED4_16: LED4.16 R16.2 | length 4
  Top Layer w0.254: LED4.16 42.9,72.975 R16.2
NetR9_1: R9.1 U5.7 | length 14.6
  Top Layer w0.254: R9.1 51.501,67.6 53.901,65.2 54.5,65.2 55.5,64.2 55.5,61 54.1,59.6 53.1,59.6 52.875,59.375 U5.7
NetR10_1: R10.1 U5.6 | length 17.7
  Top Layer w0.254: R10.1 49,52.6 49.2,52.4 49.2,48.1 49.4,47.9 51.3,47.9 51.605,48.205 U5.6
NetR11_1: R11.1 U5.5 | length 5.2
  Top Layer w0.254: R11.1 50.2,57.596 U5.5
NetR12_1: R12.1 U5.4 | length 21.7
  Top Layer w0.254: U5.4 v1(49.065,55.635) v1@49.1,55.6 ; v1(52.3,55.2) 54.6,55.2 58.1,58.7 R12.1
  Bottom Layer w0.254: v1(49.065,55.635) 49.5,55.2 v1(52.3,55.2)
NetR13_1: R13.1 U5.3 | length 22.7
  Top Layer w0.254: U5.3 47.795,55.295 46.8,54.3 46.8,48.5 48,47.3 52.838,47.3 54.016,48.478 54.016,51.205 55.411,52.6 R13.1
NetR14_1: R14.1 U5.2 | length 44.1
  Top Layer w0.254: U5.2 46.4,57.606 46.4,56.1 45.7,55.4 44.6,55.4 41.5,58.5 41.5,73.8 42.608,74.908 53.192,74.908 54.2,73.9 54.2,68.911 55.511,67.6 R14.1
NetR15_1: R15.1 U5.1 | length 11.5
  Top Layer w0.254: U5.1 43.3,59.686 43.3,64.9 45.4,67 R15.1
NetR16_1: R16.1 U5.15 | length 20.6
  Top Layer w0.254: R16.1 43.089,67.6 44,68.511 44,73.8 44.6,74.4 46,74.4 46.8,73.6 46.8,65 46.525,64.725 U5.15
NetR17_1: R17.1 U6.7 | length 17.8
  Top Layer w0.254: R17.1 83.8,67 88.5,67 91.1,64.4 91.1,61.4 88.575,58.875 U6.7
NetR18_1: R18.1 U6.6 | length 19.4
  Top Layer w0.254: R18.1 81,52.7 81.3,52.4 81.3,48.3 81.7,47.9 83.5,47.9 84,48.4 84,51.5 87.305,54.805 U6.6
NetR19_1: R19.1 U6.5 | length 7.2
  Top Layer w0.254: R19.1 83.8,52.7 86.035,54.935 U6.5
NetR20_1: R20.1 U6.4 | length 22
  Top Layer w0.254: U6.4 v1(84.765,55.835) v1@84.8,55.8 ; R20.1 92.1,66.2 92.1,56.9 v1(90.5,55.3)
  Bottom Layer w0.254: v1(84.765,55.835) 85.3,55.3 v1(90.5,55.3)
NetR21_1: R21.1 U6.3 | length 26.9
  Top Layer w0.254: U6.3 83.495,55.695 82.3,54.5 79.888,54.5 78.969,53.581 78.969,48.131 80.145,46.955 85.955,46.955 86.5,47.5 86.5,51.789 87.411,52.7 R21.1
NetR22_1: R22.1 U6.2 | length 46
  Top Layer w0.254: U6.2 82.2,57.706 82.2,56 81.6,55.4 80.4,55.4 74.1,61.7 74.1,72.362 73.984,72.478 73.984,73.984 75.5,75.5 85.9,75.5 86.684,74.716 86.684,68.927 87.611,68 R22.1
NetR23_1: R23.1 U6.1 | length 12
  Top Layer w0.254: R23.1 77.7,60.986 U6.1
NetR24_1: R24.1 U6.15 | length 20.6
  Top Layer w0.254: R24.1 76.1,68.5 76.524,68.924 76.524,73.682 76.823,73.981 78.283,73.981 79,73.264 79,68.3 82.225,65.075 U6.15
NetR25_1: R25.1 U7.7 | length 15.9
  Top Layer w0.254: R25.1 116.025,68.1 117.577,66.548 119.837,66.548 121.158,65.227 121.158,60.528 119.075,58.445 U7.7
NetR26_1: R26.1 U7.6 | length 17.7
  Top Layer w0.254: R26.1 112.93,52.5 113.724,51.706 113.724,48.594 114.299,48.019 115.557,48.019 116.264,48.726 116.264,49.981 117.805,51.522 U7.6
NetR27_1: R27.1 U7.5 | length 6
  Top Layer w0.254: R27.1 116.535,54.235 U7.5
NetR28_1: R28.1 U7.4 | length 22.2
  Top Layer w0.254: v1@115.214,55.804 v1(115.265,55.854) U7.4 ; v1(121.717,55.067) 121.717,55.448 121.818,55.55 121.818,59.955 121.742,60.031 121.742,64.627 122.3,65.185 R28.1
  Bottom Layer w0.254: v1(115.265,55.854) 121.209,55.854 121.717,55.346 v1(121.717,55.067)
NetR29_1: R29.1 U7.3 | length 23.4
  Top Layer w0.254: U7.3 113.995,56.312 110.795,53.111 110.795,48.859 112.142,47.511 117.437,47.511 118.226,48.3 118.226,51.015 119.611,52.4 R29.1
NetR30_1: R30.1 U7.2 | length 46.5
  Top Layer w0.254: U7.2 112.725,55.905 111.912,55.093 109.83,55.093 105.715,59.207 105.715,73.711 107.544,75.54 116.484,75.54 117.45,74.574 117.45,74.183 118.226,73.406 118.226,72.594 117.45,71.817 117.45,70.262 119.611,68.1 R30.1
NetR31_1: R31.1 U7.1 | length 12.1
  Top Layer w0.254: R31.1 108.433,66.933 108.433,60.754 U7.1
NetR32_1: R32.1 U7.15 | length 19.5
  Top Layer w0.254: R32.1 107.289,68.1 108.382,69.193 108.382,73.144 109.219,73.981 110.031,73.981 110.947,73.065 110.947,71.933 111.709,71.171 111.709,66.802 112.725,65.786 U7.15
NetR33_1: R33.1 U8.7 | length 18.7
  Top Layer w0.254: R33.1@146.8,68.49 146.8,67.502 148.737,65.565 154.551,65.565 154.762,65.354 154.762,61.798 151.675,58.711 U8.7
NetR34_1: R34.1 U8.6 | length 19.2
  Top Layer w0.254: R34.1 145.5,52.5 145.6,52.4 145.6,48.4 146.5,47.5 147.8,47.5 148.354,48.054 148.354,52.952 150.405,55.003 U8.6
NetR35_1: R35.1 U8.5 | length 6.2
  Top Layer w0.254: R35.1 149.135,54.835 U8.5
NetR36_1: R36.1 U8.4 | length 24.5
  Top Layer w0.254: v1(143.688,66.294) 142.545,65.151 142.545,61.9 144.882,59.563 147.32,59.563 147.865,59.018 U8.4 ; v1(149.403,67.183) 149.708,67.183 150.114,66.777 153.077,66.777 R36.1
  Bottom Layer w0.254: v1(143.688,66.294) 148.196,66.294 148.737,66.835 149.055,66.835 v1(149.403,67.183)
NetR37_1: R37.1 U8.3 | length 25.8
  Top Layer w0.254: U8.3 146.595,56.095 145.974,55.474 144.424,55.474 142.697,53.746 142.697,47.68 143.525,46.853 148.575,46.853 150.316,48.594 150.316,51.005 151.711,52.4 R37.1
NetR38_1: R38.1 U8.2 | length 42.2
  Top Layer w0.254: U8.2 145.325,56.577 144.729,55.982 143.129,55.982 142.977,56.134 142.977,59.969 138.024,64.922 138.024,73.863 139.014,74.854 146.736,74.854 147.803,73.787 147.803,71.044 150.746,68.1 R38.1
NetR39_1: R39.1 U8.1 | length 11.3
  Top Layer w0.254: R39.1 141.7,61.983 144.055,59.628 U8.1
NetR40_1: R40.1 U8.15 | length 20.7
  Top Layer w0.254: R40.1 139.389,68.1 140.386,69.097 140.386,73.889 140.716,74.219 142.316,74.219 142.859,73.676 142.859,70.323 143.789,69.393 143.789,67.09 145.325,65.555 U8.15
NetU2_1: U2.1 X2.1 | length 2.3
  Bottom Layer w0.254: X2.1 115.776,67.056 U2.1
NetU2_2: U2.2 X2.4 | length 2.3
  Bottom Layer w0.254: X2.4 117.617,68.138 U2.2
NetU5_14: U5.14 U6.9 | length 48
  Top Layer w0.254: U5.14 47.795,64.508 v1(48.108,64.821) ; U6.9@89.845,64.333 U6.9 89.845,62.53 v1(90.373,62.001)
  Bottom Layer w0.254: v1(48.108,64.821) 50.232,64.821 50.283,64.77 50.809,64.77 50.86,64.821 66.827,64.821 68.999,62.649 69.253,62.649 70.129,61.773 78.547,61.773 78.954,62.179 90.195,62.179 v1(90.373,62.001)
NetU6_14: U6.14 U7.9 | length 45.8
  Top Layer w0.254: U6.14 83.495,64.547 v1(83.591,64.643) ; v1(109.068,64.364) 109.068,61.443 110.642,59.868 119.38,59.868 120.345,60.833 U7.9
  Bottom Layer w0.254: v1(83.591,64.643) 92.761,64.643 94.386,63.017 97.333,63.017 98.679,64.364 v1(109.068,64.364)
NetU7_14: U7.14 U8.9 | length 56.8
  Top Layer w0.254: U7.14 113.995,65.43 114.249,65.684 v1(114.249,65.862) ; v1(123.19,65.532) 123.19,63.99 122.25,63.05 122.25,60.242 126.942,55.55 136.931,55.55 138.405,54.077 v1(140.691,54.077) ; v1(149.022,59.817) 151.105,59.817 152.945,61.657 U8.9
  Bottom Layer w0.254: v1(114.249,65.862) 116.247,65.862 116.272,65.888 116.798,65.888 116.824,65.862 122.86,65.862 v1(123.19,65.532) ; v1(140.691,54.077) 140.691,55.799 141.751,56.86 141.751,57.347 143.916,59.512 148.717,59.512 v1(149.022,59.817)
RESET: C1.1 H1.5 KEY1.2 R1.1 U1.29 | length 154.5
  Top Layer w0.254: v1(38.8,57.4) 39.6,56.6 39.6,46.8 39.953,46.447 135.247,46.447 136.065,47.265 136.065,49.146 v1(136.144,49.225) ; H1.5 137.49,71.501 137.49,63.603 v1(136.294,62.406) 138.494,62.406 139.852,61.048 139.852,61.027 140.1,60.78 v1(140.1,59.5)
  Bottom Layer w0.254: KEY1.2 29,59.231 35.369,59.231 R1.1 C1.1 37.9,58.3 v1(38.8,57.4) ; v1(136.144,49.225) 138.76,51.841 138.76,56.024 139.973,57.237 139.973,57.763 140.1,57.89 v1(140.1,59.5) ; v1@136.2,62.5 v1(136.294,62.406) U1.29
RXD: U1.30 U3.2 | length 16.9
  Bottom Layer w0.254: U1.30 138.638,61.606 139.589,60.655 147.625,60.655 151.825,64.855 U3.2
SCL: U1.28 U2.6 | length 18.3
  Top Layer w0.254: v1(128.118,69.698) 128.6,69.215 128.6,67.989 128.626,67.963 128.626,67.92 128.635,67.92 129.007,67.548 129.007,67.539 131.928,64.618 131.978,64.618 132.055,64.541 132.784,64.541 133.706,63.62 133.706,63.44 134.23,62.916 v1(134.29,62.916)
  Bottom Layer w0.254: U2.6 124.917,69.596 125.552,70.231 127.61,70.231 128.143,69.698 v1(128.118,69.698) ; v1(134.29,62.916) 134.417,63.043 136.584,63.043 136.745,63.204 U1.28
SCLK: H1.3 U1.17 U5.11 U6.11 U7.11 U8.11 | length 152
  Top Layer w0.254: v1(51.511,66.218) 51.605,65.946 U5.11 ; U6.11 87.427,63.39 v1(87.478,66.218) ; v1(104.8,66.548) 104.8,73.515 107.855,76.569 131.635,76.569 133.147,75.057 133.147,74.192 133.831,73.508 134.596,73.508 136.525,71.579 v1(136.525,69.444) 136.465,69.444 135.856,68.834 v1(130.785,68.834) 132.944,70.993 132.944,73.228 131.775,74.397 H1.3 ; v1(113.386,66.548) 116.611,66.548 117.805,65.354 U7.11 ; v1(144.831,68.275) 145.491,67.615 145.491,67.259 146.152,66.599 146.964,66.599 148.814,64.75 150.328,64.75 150.405,64.672 U8.11
  Bottom Layer w0.254: v1(51.511,66.218) v1(87.478,66.218) 87.492,66.232 97.216,66.232 97.532,66.548 v1(104.8,66.548) v1(113.386,66.548) ; v1(130.785,68.834) 130.809,68.81 U1.17 ; v1(136.525,69.444) 136.627,69.342 137.058,69.342 138.125,68.275 v1(144.831,68.275)
SDA: U1.27 U2.5 | length 18.2
  Top Layer w0.254: v1(128.651,70.256) 128.651,70.113 129.108,69.656 129.108,68.199 132.182,65.126 132.189,65.126 132.265,65.049 132.994,65.049 134.214,63.83 134.214,63.703 v1(134.341,63.703)
  Bottom Layer w0.254: U2.5 127.94,70.866 128.651,70.155 v1(128.651,70.256) ; v1@134.341,63.665 136.283,63.665 136.622,64.004 U1.27
STCP: U1.14 U5.12 U6.12 U7.12 U8.12 | length 129.9
  Top Layer w0.254: U5.12 50.335,65.067 v1(50.546,65.405) ; U6.12 86.03,63.274 v1(86.106,65.405) ; U7.12 v1(116.535,65.252) ; v1(124.003,65.151) 124.003,64.999 124.435,64.567 124.485,64.567 ; v1(125.451,64.541) 124.511,64.541 124.485,64.567 ; v1(140.487,61.29) 142.469,59.309 142.469,55.626 141.732,54.889 138.31,54.889 137.142,56.058 127.152,56.058 122.758,60.452 122.758,62.84 124.485,64.567 ; v1(147.041,61.392) 148.717,61.392 149.135,61.81 U8.12
  Bottom Layer w0.254: v1(50.546,65.405) v1(86.106,65.405) 113.808,65.405 113.986,65.227 116.51,65.227 v1(116.535,65.252) 116.662,65.126 116.662,65.024 122.8,65.024 122.927,64.897 123.453,64.897 123.707,65.151 v1(124.003,65.151) ; v1(125.451,64.541) 125.552,64.44 126.966,64.44 127.296,64.11 127.822,64.11 127.938,63.994 U1.14 ; v1(140.487,61.29) 146.939,61.29 v1(147.041,61.392)
TXD: U1.31 U3.3 | length 18.1
  Bottom Layer w0.254: U1.31 138.059,60.729 138.561,60.729 138.679,60.847 139.379,60.147 147.967,60.147 153.095,65.276 U3.3
pads on no net: BT1. KEY1.3 KEY1.4 KEY2.3 KEY2.4 KEY3.3 KEY3.4 KEY4.3 KEY4.4 U1.19 U1.22 U3.7 U3.8 U3.9 U3.10 U3.11 U3.12 U3.14 U3.15 U4.3 U5.9 USB1. USB1.0 USB1.4

## Polygon pours and split planes (outlines as drawn)
GND on Bottom Layer "Bottom Layer-No Net" (solid, remove dead copper, pour order 2): 24.511,78.054 175.87,78.054 175.971,78.156 176.581,77.546 176.581,42.342 24.308,42.342 23.8,42.85
GND on Top Layer "Bottom Layer-No Net" (solid, remove dead copper, pour order 4): 24.206,78.257 25.019,79.07 177.368,79.07 177.368,44.171 178.079,43.459 175.971,41.351 22.479,41.351

## Keep-outs
Keep-Out Layer:
  the board outline again, w0.1